# Altium PCB TO-252-2_L6.6-W6.1-P4.58-LS9.9-TL.pcbdoc
Units mm, origin at the board's own origin, x right, y up, seen from the top; angles counter-clockwise.
Board outline 23.92 x 19.41 mm, 2 copper layers (Top Layer, Bottom Layer); 1 components, 0 nets, 3 pads, 0 vias.
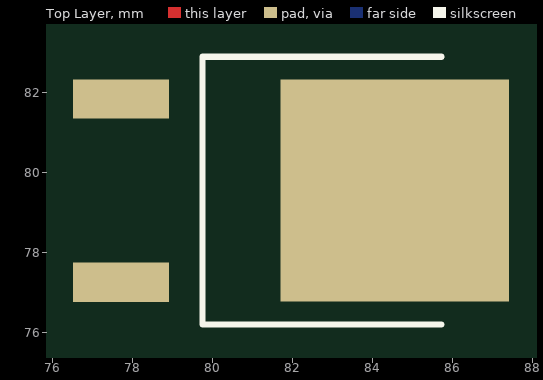
[diagram p0: Top Layer view]
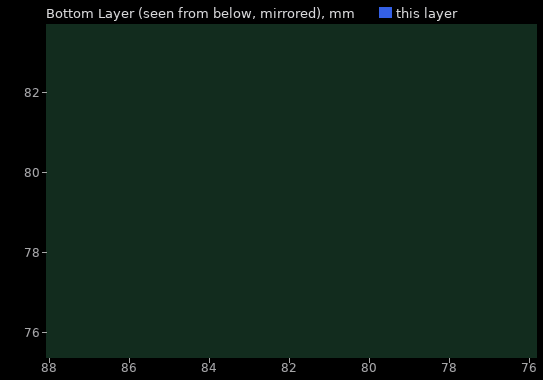
[diagram p1: Bottom Layer view, seen from below]

## Layer stack, top to bottom
Top Layer: signal copper (thickness not stored)
Dielectric: dielectric 0.32, FR-4, Dk 4.8
Bottom Layer: signal copper (thickness not stored)

## Board outline
93.769,69.85 69.85,69.85 69.85,89.256 93.769,89.256

## Components (designator, comment, footprint, x,y, rotation, side; value= is the part's Value field where it differs from the comment)
? "TO-252-2_L6.6-W6.1-P4.58-LS9.9-TL" TO-252-2_L6.6-W6.1-P4.58-LS9.9-TL 81.14,79.546 r0 top

## Footprints (in the part's own frame and the unit in brackets; to place one, negate y for a bottom-side part, rotate by r counter-clockwise, add the part's x,y. Pads: shape width x height; smd on the part's side, far side on the other; paste and mask are expansions set on the pad)
TO-252-2_L6.6-W6.1-P4.58-LS9.9-TL [mm]
  rect 2.409x0.979 smd: 1(-3.424,2.29) 3(-3.423,-2.29)
  rect 5.711x5.548 smd: 2(3.424,0)
  silkscreen extent -1.38,-3.35 4.58,3.35

## Nets (pads, with @x,y where several pads share a name; then routed paths per layer and width w, separated by ;. In a path a pad name is that pad's centre, name@x,y a point inside that pad or via, vN(x,y) a via of type N, cw(c..) or ccw(c..) an arc to the next point about the centre after c; other vN are vias at no path point)
pads on no net: ?.1 ?.2 ?.3